# EAGLE board FLYTE_3.0 (EAGLE 9.6.2), part 1 of 2
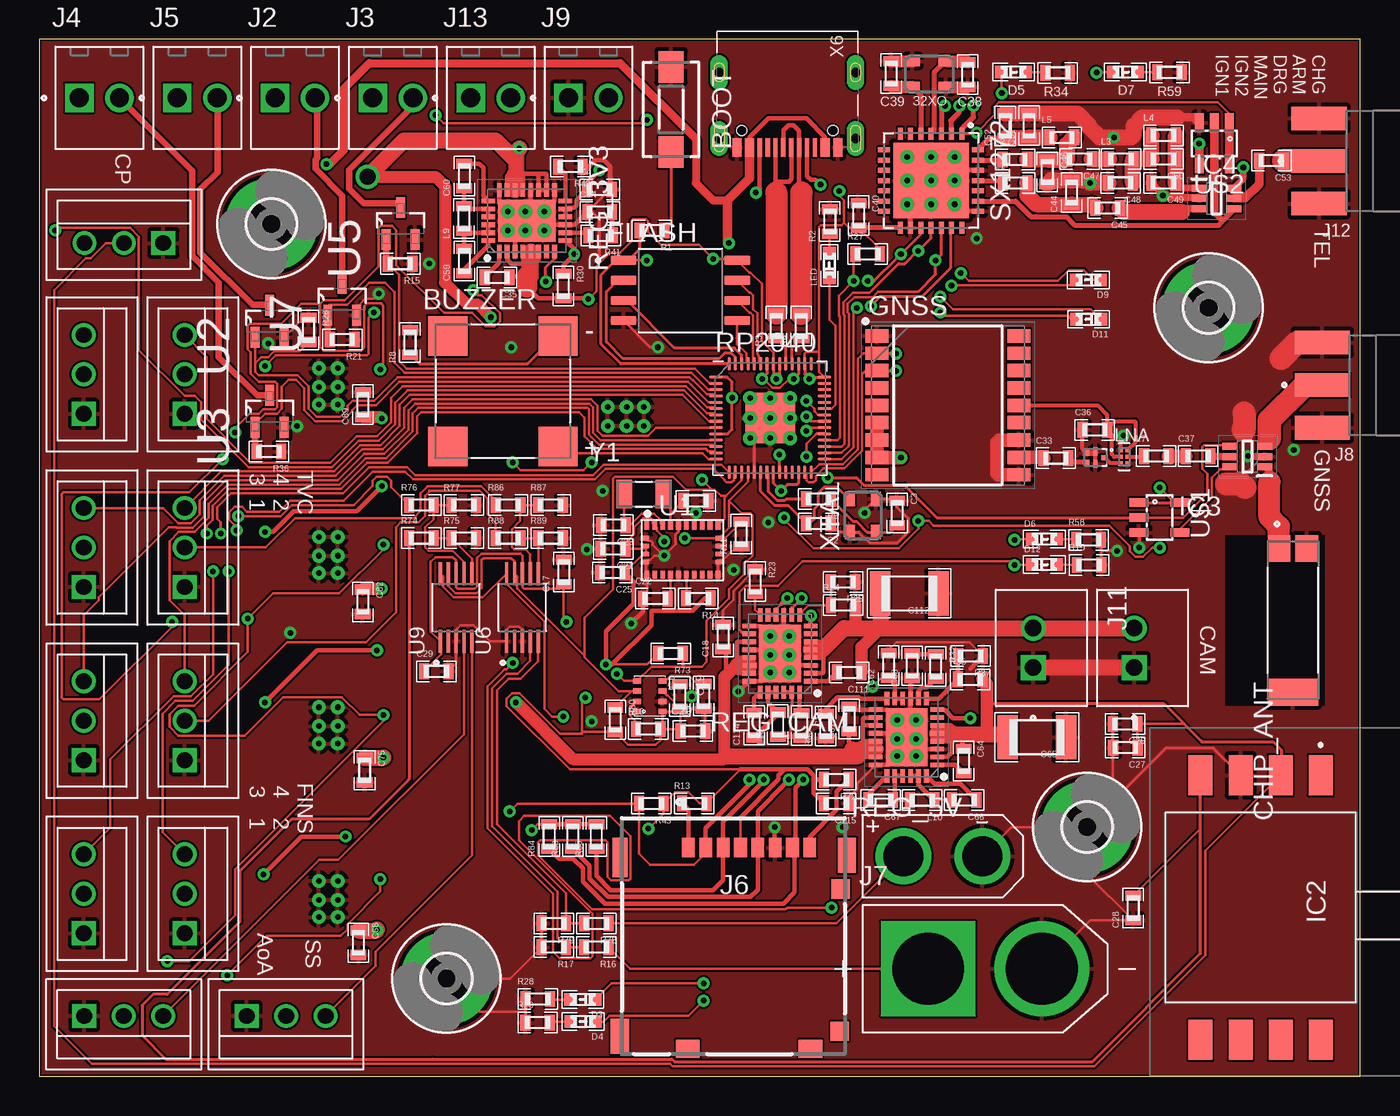
[diagram p0: board, top side]
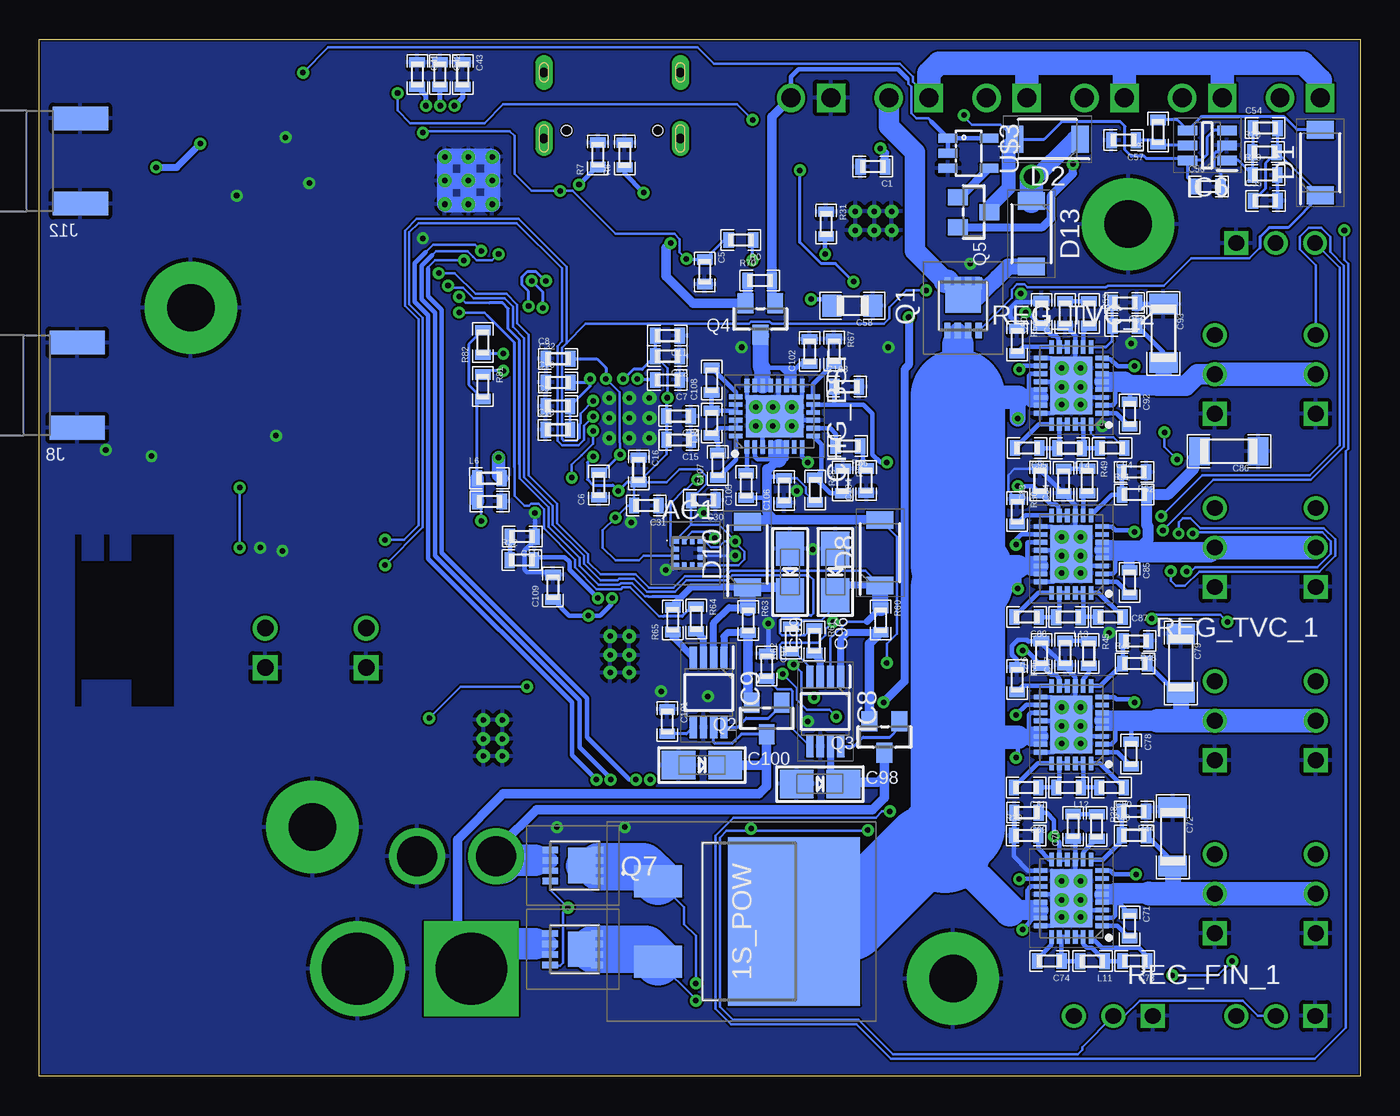
[diagram p1: board, bottom side, seen from below]

Size 83.7 x 65.7 mm. Coordinates in mm from the lower left corner, seen from the top.
Outline: 0,0 83.7,0 83.7,65.7 0,65.7 0,0
Copper layers (1*16): Top 0.075mm / dielectric 1.6mm / Bottom 0.075mm
Design rules "default *": minimum track width 5mil, minimum drill 0.1mm, track to track 5mil, track to pad 5mil, pad to pad 5mil, via to via 5mil, smd to smd 5mil, copper to edge 5mil, drill to drill 6mil, minimum pad ring 10mil, minimum via ring 8mil, stop-mask expansion 4mil, vias tented up to drill 0mil, thermal gap 10mil
Net classes: 1 power: width 0.305 mm

## Footprints (pad centres in the part's own frame; a part is rotated, then mirrored left to right if it is on the bottom)
V60D60CM3I = smd 2.03 x 3.05: 1 -2.54,-12.806; 2 2.54,-12.806 | smd 10.66 x 8.38: 3 0,-4.19
ASE = smd 0.9 x 0.65: 1 -1.05,-0.825; 2 1.05,-0.825; 3 1.05,0.825; 4 -1.05,0.825
KX1341211 = smd 0.35 x 0.3: 1 -0.762,0.75; 2 -0.762,0.25; 3 -0.762,-0.25; 4 -0.762,-0.75; 7 0.762,-0.75; 8 0.762,-0.25; 9 0.762,0.25; 10 0.762,0.75 | smd 0.3 x 0.35: 5 -0.25,-0.75; 6 0.25,-0.75; 11 0.25,0.75; 12 -0.25,0.75
B3B-XH = drill 1 square: P$1 2.5,0 | drill 1: P$2 0,0; P$3 -2.5,0
DTSM-3 = smd 2 x 1.6: 1 -2.7,0; 2 2.7,0
CUI_CMT-8530S-SMT = smd 2.5 x 2.5: 1 -3.5,3.5; 2 -3.5,-3.5; N 3.5,3.5; P 3.5,-3.5
0603 = smd 0.65 x 1: 1 -0.775,0; 2 0.775,0
0805 = smd 1.2 x 1.4: 1 -1.3,0; 2 1.3,0
1210 = smd 1.3 x 2.8: 1 -1.85,0; 2 1.85,0
1206 = smd 1.3 x 1.8: 1 -1.85,0; 2 1.85,0
EIA3216-18/A-W = smd 2.15 x 1.8: + 1.475,0; - -1.475,0
QFN50P400X500X83-29N = smd 0.85 x 0.3: 1 -1.95,1.75; 2 -1.95,1.25; 3 -1.95,0.75; 4 -1.95,0.25; 5 -1.95,-0.25; 6 -1.95,-0.75; 7 -1.95,-1.25; 8 -1.95,-1.75; 15 1.95,-1.75; 16 1.95,-1.25; 17 1.95,-0.75; 18 1.95,-0.25; 19 1.95,0.25; 20 1.95,0.75; 21 1.95,1.25; 22 1.95,1.75 | smd 0.3 x 0.85: 9 -1.25,-2.45; 10 -0.75,-2.45; 11 -0.25,-2.45; 12 0.25,-2.45; 13 0.75,-2.45; 14 1.25,-2.45; 23 1.25,2.45; 24 0.75,2.45; 25 0.25,2.45; 26 -0.25,2.45; 27 -0.75,2.45; 28 -1.25,2.45 | smd 2.65 x 3.65: 29 0,0 | drill 0.35: P$1 -0.6,1.2; P$2 0.6,1.2; P$3 -0.6,0.1; P$4 0.6,0.1; P$5 -0.6,-1.1; P$6 0.6,-1.1
XCVR_W3010 = smd 1.7 x 1.45: 1 4.55,0.875; 2 4.55,-0.875 | smd 1.7 x 3.2: 3 -4.55,0
SODFL4725X105N = smd 1.12 x 1.72: 1 -2.075,0; 2 2.075,0
0603.LED = smd 0.8 x 0.8: P$1 -0.775,0; P$2 0.775,0
SOIC127P790X216-8N = smd 1.61 x 0.58: 1 -3.605,1.905; 2 -3.605,0.635; 3 -3.605,-0.635; 4 -3.605,-1.905; 5 3.605,-1.905; 6 3.605,-0.635; 7 3.605,0.635; 8 3.605,1.905
SON110P970X1010X230-18N = smd 1.45 x 0.85: 1 -4.5,4.4; 2 -4.5,3.3; 3 -4.5,2.2; 4 -4.5,1.1; 5 -4.5,0; 6 -4.5,-1.1; 7 -4.5,-2.2; 8 -4.5,-3.3; 9 -4.5,-4.4; 10 4.5,-4.4; 11 4.5,-3.3; 12 4.5,-2.2; 13 4.5,-1.1; 14 4.5,0; 15 4.5,1.1; 16 4.5,2.2; 17 4.5,3.3; 18 4.5,4.4
3,0-PAD = drill 3 pad 5.842: B3,0 0,0
BMP280 = smd 0.35 x 0.5: 1 0.975,-0.8; 2 0.325,-0.8; 3 -0.325,-0.8; 4 -0.975,-0.8; 5 -0.975,0.8; 6 -0.325,0.8; 7 0.325,0.8; 8 0.975,0.8
MPXV5100DP = smd 2.54 x 1.52: 1 8.38,-3.81; 2 8.38,-1.27; 3 8.38,1.27; 4 8.38,3.81; 5 -8.38,3.81; 6 -8.38,1.27; 7 -8.38,-1.27; 8 -8.38,-3.81
SOT65P220X100-6N = smd 0.95 x 0.45: 1 -1.1,0.65; 2 -1.1,0; 3 -1.1,-0.65; 4 1.1,-0.65; 5 1.1,0; 6 1.1,0.65
SOT95P280X145-6N = smd 1.25 x 0.6: 1 -1.25,0.95; 2 -1.25,0; 3 -1.25,-0.95; 4 1.25,-0.95; 5 1.25,0; 6 1.25,0.95
SOP65P490X110-8N = smd 1.4 x 0.45: 1 -2.2,0.975; 2 -2.2,0.325; 3 -2.2,-0.325; 4 -2.2,-0.975; 5 2.2,-0.975; 6 2.2,-0.325; 7 2.2,0.325; 8 2.2,0.975
TE_282834-2 = drill 1.2 square: 1 -1.27,0 | drill 1.2: 2 1.27,0
5031821852 = smd 0.8 x 1.24: 1 -2.85,0.63; 2 -1.75,0.63; 3 -0.65,0.63; 4 0.45,0.63; 5 1.55,0.63; 6 2.65,0.63; 7 3.75,0.63; 8 4.85,0.63 | smd 0.95 x 2.5: 9 -7.195,0 | smd 1.15 x 2.2: 10 7.195,0.15; 15 -7.195,-11.33 | smd 1.16 x 1.25: 11 6.795,-2 | smd 1.16 x 1.2: 12 6.74,-11 | smd 1.5 x 1.15: 13 4.89,-12.125; 14 -2.89,-12.125
AMASS_XT60-M = drill 4.55 pad 6: N 3.6,0 | drill 4.55 pad 6 square: P -3.6,0
RFSOLUTIONS_CON-SMA-EDGE-S = smd 3.5 x 1.5: 1 0,0; G1 0,2.7; G2 0,-2.7 | smd 3.5 x 1.5 bottom: G3 0,2.7; G4 0,-2.7
JST_B2B-XH-A(LF)(SN) = drill 1.05 square: 1 1.25,-0.525 | drill 1.05: 2 -1.25,-0.525
AMP_BGA725L6E6327FTSA1 = smd 0.25 x 0.25: 1 -0.2,0.4; 2 -0.2,0; 3 -0.2,-0.4; 4 0.2,-0.4; 5 0.2,0; 6 0.2,0.4
SIS862DNT1GE3 = smd 0.99 x 0.405: 1 -1.555,0.992; 2 -1.555,0.332; 3 -1.555,-0.328; 4 -1.555,-0.988 | smd 0.51 x 0.405: 5 1.555,-0.988; 6 1.555,-0.328; 7 1.555,0.332; 8 1.555,0.992 | smd 1.725 x 2.235: 9 0.438,0.002 | smd 0.25 x 0.2: 10 1.175,-1.096; 11 1.175,1.096
SOT23-WIDE = smd 1 x 1.27: 1 -0.95,-1; 2 0.95,-1; 3 0,1
RP2040-QFN-56 = smd 0.875 x 0.2: 1 -3.438,2.6; 2 -3.438,2.2; 3 -3.438,1.8; 4 -3.438,1.4; 5 -3.438,1; 6 -3.438,0.6; 7 -3.438,0.2; 8 -3.438,-0.2; 9 -3.438,-0.6; 10 -3.438,-1; 11 -3.438,-1.4; 12 -3.438,-1.8; 13 -3.438,-2.2; 14 -3.438,-2.6; 29 3.438,-2.6; 30 3.438,-2.2; 31 3.438,-1.8; 32 3.438,-1.4; 33 3.438,-1; 34 3.438,-0.6; 35 3.438,-0.2; 36 3.438,0.2; 37 3.438,0.6; 38 3.438,1; 39 3.438,1.4; 40 3.438,1.8; 41 3.438,2.2; 42 3.438,2.6 | smd 0.2 x 0.875: 15 -2.6,-3.438; 16 -2.2,-3.438; 17 -1.8,-3.438; 18 -1.4,-3.438; 19 -1,-3.438; 20 -0.6,-3.438; 21 -0.2,-3.438; 22 0.2,-3.438; 23 0.6,-3.438; 24 1,-3.438; 25 1.4,-3.438; 26 1.8,-3.438; 27 2.2,-3.438; 28 2.6,-3.438; 43 2.6,3.438; 44 2.2,3.438; 45 1.8,3.438; 46 1.4,3.438; 47 1,3.438; 48 0.6,3.438; 49 0.2,3.438; 50 -0.2,3.438; 51 -0.6,3.438; 52 -1,3.438; 53 -1.4,3.438; 54 -1.8,3.438; 55 -2.2,3.438; 56 -2.6,3.438 | smd 3.2 x 3.2: 57 0,0 | drill 0.35 pad 0.6: 58 -1.275,1.275; 59 0,1.275; 60 1.275,1.275; 61 -1.275,0; 62 0,0; 63 1.275,0; 64 -1.275,-1.275; 65 0,-1.275; 66 1.275,-1.275
FIL_AFS14A04-1575.42-T3 = smd 0.425 x 0.325: A 0.588,0.287; C -0.588,0; E 0.588,-0.287 | smd 0.25 x 0.525: B 0,0.388; D 0,-0.388
QFN65P600X600X100-29N = smd 0.76 x 0.32: 1 -2.98,1.95; 2 -2.98,1.3; 3 -2.98,0.65; 4 -2.98,0; 5 -2.98,-0.65; 6 -2.98,-1.3; 7 -2.98,-1.95; 15 2.98,-1.95; 16 2.98,-1.3; 17 2.98,-0.65; 18 2.98,0; 19 2.98,0.65; 20 2.98,1.3; 21 2.98,1.95 | smd 0.32 x 0.76: 8 -1.95,-2.98; 9 -1.3,-2.98; 10 -0.65,-2.98; 11 0,-2.98; 12 0.65,-2.98; 13 1.3,-2.98; 14 1.95,-2.98; 22 1.95,2.98; 23 1.3,2.98; 24 0.65,2.98; 25 0,2.98; 26 -0.65,2.98; 27 -1.3,2.98; 28 -1.95,2.98 | smd 4.8 x 4.8: 29 0,0 | drill 0.35: P$1 -1.5,1.5; P$2 0,1.5; P$3 1.5,1.5; P$4 1.5,0; P$5 0,0; P$6 -1.5,0; P$7 -1.5,-1.5; P$8 0,-1.5; P$9 1.5,-1.5
LGA28R50P4X10_380X520X100 = smd 0.3 x 0.525: 1 -2.25,1.562; 6 -2.25,-1.562; 7 -1.75,-1.562; 8 -1.25,-1.562; 9 -0.75,-1.562; 10 -0.25,-1.562; 11 0.25,-1.562; 12 0.75,-1.562; 13 1.25,-1.562; 14 1.75,-1.562; 15 2.25,-1.562; 20 2.25,1.562; 21 1.75,1.562; 22 1.25,1.562; 23 0.75,1.562; 24 0.25,1.562; 25 -0.25,1.562; 26 -0.75,1.562; 27 -1.25,1.562; 28 -1.75,1.562 | smd 0.425 x 0.3: 2 -2.312,0.75; 3 -2.312,0.25; 4 -2.312,-0.25; 5 -2.312,-0.75; 16 2.312,-0.75; 17 2.312,-0.25; 18 2.312,0.25; 19 2.312,0.75
SOT91P240X120-3N = smd 1.321 x 0.559: 1 -1.016,0.914; 2 -1.016,-0.914; 3 1.016,0
SOP50P490X110-10N = smd 1.47 x 0.28: 1 -2.15,1; 2 -2.15,0.5; 3 -2.15,0; 4 -2.15,-0.5; 5 -2.15,-1; 6 2.15,-1; 7 2.15,-0.5; 8 2.15,0; 9 2.15,0.5; 10 2.15,1
SOT23-5 = smd 0.55 x 1.2: 1 -0.95,-1.3; 2 0,-1.3; 3 0.95,-1.3; 4 0.95,1.3; 5 -0.95,1.3
XT30UPB-M = drill 2.54: P$1 -2.5,0; P$2 2.5,0
USB_C_CUSB31-CFM2AX-01-X = smd 0.575 x 1.15: A1B12 -3.2,3.545; A4B9 -2.4,3.545; B1A12 3.2,3.545; B4A9 2.4,3.545 | smd 0.275 x 1.15: A5 -1.25,3.545; A6 -0.25,3.545; A7 0.25,3.545; A8 1.25,3.545; B5 1.75,3.545; B6 0.75,3.545; B7 -0.75,3.545; B8 -1.75,3.545 | drill 0.6 pad 1 long: M1 -4.32,2.97; M2 4.32,2.97; M3 -4.32,-1.21; M4 4.32,-1.21 | hole 0.65: 2.89,2.47; -2.89,2.47
XTAL_FC-135_32.7680KA-A0 = smd 1 x 1.8: 1 -1.25,0; 2 1.25,0

## Placement (x,y rotation side)
1S_POW  V60D60C-M3_I  [V60D60CM3I]  31.69,9.82 270 bottom
32XO  ASE  [ASE]  56.39,63.51 0 top
AC1  KX134-1211  [KX1341211]  42.58,33.15 0 bottom
AOA  03-JST-B3B-XH-A  [B3B-XH]  5.34,3.83 180 top
BOOT  DTSM-3  [DTSM-3]  40.03,61.26 270 top
BUZZER  BUZZER  [CUI_CMT-8530S-SMT]  29.37,43.42 0 top
C1  10 uF  [0603]  30.88,57.64 180 bottom
C2  24 pF  [0603]  49.37,35.04 180 top
C3  24 pF  [0603]  54.36,35.7 270 top
C4  4.7 uF  [0603]  35.5,56.2 0 top
C5  100 nF  [0603]  41.54,50.98 270 bottom
C6  100 nF  [0603]  48.24,37.47 90 bottom
C7  100 nF  [0603]  43.9,44.13 180 bottom
C8  1 uF  [0603]  50.83,45.47 0 bottom
C9  100 nF  [0603]  50.84,42.47 0 bottom
C10  1 uF  [0603]  50.83,43.97 0 bottom
C11  100 nF  [0603]  43.9,46.93 180 bottom
C12  100 nF  [0603]  43.9,45.63 180 bottom
C13  100 nF  [0603]  50.84,40.97 0 bottom
C14  100 nF  [0603]  43.19,41.83 180 bottom
C15  100 nF  [0603]  43.18,40.33 180 bottom
C16  100 nF  [0603]  45.73,38.43 270 bottom
C17  0.1 uF  [0603]  33.23,31.96 90 top
C18  10 uF  [0603]  43.33,27.85 90 top
C19  100 nF  [0603]  40.58,24.07 270 top
C20  100 nF  [0603]  41.42,21.88 0 top
C21  100 nF  [0603]  36.36,33.43 180 top
C22  100 nF  [0603]  39.03,30.27 0 top
C23  25 pF  [0603]  36.38,34.93 180 top
C24  25 pF  [0603]  41.61,36.47 0 top
C25  100 nF  [0603]  36.3,31.93 180 top
C26  1 uF  [0603]  68.81,22.33 180 top
C27  10 nF  [0603]  68.82,20.83 180 top
C28  470 pF  [0603]  69.33,10.67 90 top
C29  0.1 uF  [0603]  25.16,25.67 0 top
C30  0.1 uF  [0603]  41.62,36.51 180 bottom
C31  0.1 uF  [0603]  45.24,36.17 180 bottom
C32  10 nF  [0603]  55.17,36.43 180 bottom
C33  120 pF  [0603]  64.42,39.17 0 top
C34  3.3 nF  [0603]  35.51,54.77 0 top
C35  22 nF  [0603]  29,50.63 180 top
C36  1 nF  [0603]  66.89,40.97 0 top
C37  120 pF  [0603]  73.44,39.3 0 top
C38  24 pF  [0603]  58.83,63.47 90 top
C39  24 pF  [0603]  53.98,63.54 270 top
C40  100 nF  [0603]  51.92,54.55 270 top
C41  100 nF  [0603]  59.76,63.48 270 bottom
C42  100 nF  [0603]  58.32,63.48 270 bottom
C43  100 nF  [0603]  56.88,63.48 270 bottom
C44  3.3 pF  [0603]  65.42,56.01 90 top
C45  47 pF  [0603]  67.7,55.02 180 top
C46  8.2 pF  [0603]  63.88,57.31 270 top
C47  22 pF  [0603]  65.92,58.12 180 top
C48  8.2 pF  [0603]  68.53,56.62 180 top
C49  3.3 pF  [0603]  71.24,56.62 180 top
C50  1.5 pF  [0603]  71.25,58.12 180 top
C51  10 nF  [0603]  62.72,60.24 90 top
C52  47 pF  [0603]  61.22,60.23 90 top
C53  47 pF  [0603]  78.08,58.02 180 top
C54  10 pF  [0603]  6.01,60.08 0 bottom
C55  1 uF  [0603]  6,55.48 0 bottom
C56  1 uF  [0603]  9.61,56.38 0 bottom
C57  4.7 uF  [0603]  14.98,59.32 180 bottom
C58  100 uF  [0805]  32.17,48.83 180 bottom
C59  0.22 uF  [0603]  26.92,51.66 90 top
C60  0.22 uF  [0603]  26.92,57.05 90 top
C61  10 uF  [0603]  51.32,22.64 90 top
C62  4.7 uF  [0603]  53.82,26.03 90 top
C63  1.8 nF  [0603]  55.32,26.02 90 top
C64  22 nF  [0603]  58.58,19.99 270 top
C65  220 uF  [1210]  63.22,21.49 180 top
C66  0.22 uF  [0603]  58.61,17.52 180 top
C67  0.22 uF  [0603]  53.32,17.52 180 top
C68  10 uF  [0603]  20.22,8.47 270 top
C69  4.7 uF  [0603]  21.14,16.71 180 bottom
C70  1.8 nF  [0603]  18.19,15.85 90 bottom
C71  22 nF  [0603]  14.61,9.54 270 bottom
C72  100 uF  [1206]  11.87,15.19 270 bottom
C73  0.22 uF  [0603]  14.28,7.31 180 bottom
C74  0.22 uF  [0603]  19.69,7.31 180 bottom
C75  10 uF  [0603]  20.61,19.4 270 top
C76  4.7 uF  [0603]  20.19,26.81 90 bottom
C77  1.8 nF  [0603]  18.69,26.82 90 bottom
C78  22 nF  [0603]  14.51,20.43 270 bottom
C79  100 uF  [1206]  11.36,26.19 270 bottom
C80  0.22 uF  [0603]  15.75,18.31 180 bottom
C81  0.22 uF  [0603]  21.16,18.31 180 bottom
C82  10 uF  [0603]  20.49,30.07 270 top
C83  4.7 uF  [0603]  20.29,37.72 90 bottom
C84  1.8 nF  [0603]  18.79,37.71 90 bottom
C85  22 nF  [0603]  14.61,31.3 270 bottom
C86  100 uF  [1206]  8.31,39.61 180 bottom
C87  0.22 uF  [0603]  15.82,29.11 180 bottom
C88  0.22 uF  [0603]  21.13,29.11 180 bottom
C89  10 uF  [0603]  20.51,42.56 90 top
C90  4.7 uF  [0603]  20.19,48.35 90 bottom
C91  1.8 nF  [0603]  18.69,48.34 90 bottom
C92  22 nF  [0603]  14.61,41.97 270 bottom
C93  100 uF  [1206]  12.46,47.08 270 bottom
C94  0.22 uF  [0603]  15.71,39.81 180 bottom
C95  0.22 uF  [0603]  21.1,39.81 180 bottom
C96  10uF  [EIA3216-18/A-W]  33.26,31.96 270 bottom
C97  0.1 uF  [0603]  37.61,25.99 270 bottom
C98  10uF  [EIA3216-18/A-W]  34.23,18.53 0 bottom
C99  10uF  [EIA3216-18/A-W]  36.13,31.96 270 bottom
C100  10uF  [EIA3216-18/A-W]  41.71,19.73 0 bottom
C101  0.1 uF  [0603]  43.91,22.48 270 bottom
C102  10 uF  [0603]  34.89,45.93 90 bottom
C103  4.7 uF  [0603]  32.54,43.7 0 bottom
C104  1.2 nF  [0603]  31.3,37.75 90 bottom
C105  22 nF  [0603]  38.9,37.44 90 bottom
C106  10 uF  [0603]  36.5,37.13 90 bottom
C107  0.22 uF  [0603]  40.7,38.72 90 bottom
C108  0.22 uF  [0603]  41.1,44.11 90 bottom
C109  4.7 uF  [0603]  51.15,31 90 bottom
C110  1.8 nF  [0603]  53.11,34.2 180 bottom
C111  22 nF  [0603]  51.32,25.6 180 top
C112  100 uF  [1210]  55.13,30.6 180 top
C113  0.22 uF  [0603]  48.3,22.24 270 top
C114  0.22 uF  [0603]  45.3,22.25 90 top
C115  1 uF  [0603]  50.5,17.3 180 top
CHG_BST  LT3120JV#PBF  [QFN50P400X500X83-29N]  37.11,41.82 90 bottom
CHIP_ANT  W3010  [XCVR_W3010]  79.44,28.9 90 top
D1  RSX501LAM20TR  [SODFL4725X105N]  2.52,57.9 90 bottom
D2  RSX501LAM20TR  [SODFL4725X105N]  19.81,59.38 180 bottom
D3  [0603.LED]  34.44,4.87 180 top
D4  [0603.LED]  34.45,3.47 180 top
D5  [0603.LED]  61.74,63.63 0 top
D6  [0603.LED]  63.69,34.04 0 top
D7  [0603.LED]  68.82,63.63 0 top
D8  RSX501LAM20TR  [SODFL4725X105N]  30.42,33.18 90 bottom
D9  [0603.LED]  66.49,50.47 180 top
D10  RSX501LAM20TR  [SODFL4725X105N]  38.82,33.07 90 bottom
D11  [0603.LED]  66.5,47.97 180 top
D12  [0603.LED]  63.69,32.43 0 top
D13  RSX501LAM20TR  [SODFL4725X105N]  20.83,53.39 270 bottom
FIN_1  03-JST-B3B-XH-A  [B3B-XH]  2.8,11.57 270 top
FIN_2  03-JST-B3B-XH-A  [B3B-XH]  9.2,11.57 270 top
FIN_3  03-JST-B3B-XH-A  [B3B-XH]  2.8,22.54 270 top
FIN_4  03-JST-B3B-XH-A  [B3B-XH]  9.2,22.54 270 top
FLASH  W25Q128JVSIQ  [SOIC127P790X216-8N]  40.62,49.8 0 top
GNSS  TESEO-LIV3F  [SON110P970X1010X230-18N]  57.57,42.52 0 top
H1  MOUNT-PAD-ROUND3.0  [3,0-PAD]  66.4,15.8 0 top
H2  MOUNT-PAD-ROUND3.0  [3,0-PAD]  74.1,48.7 0 top
H3  MOUNT-PAD-ROUND3.0  [3,0-PAD]  25.8,6.2 0 top
H4  MOUNT-PAD-ROUND3.0  [3,0-PAD]  14.7,54 0 top
IC1  BMP280  [BMP280]  38.68,24.09 270 top
IC2  MPXV5100DP  [MPXV5100DP]  77.4,10.7 90 top
IC3  AS179-92LF  [SOT65P220X100-6N]  76.56,39.27 180 top
IC4  AS179-92LF  [SOT65P220X100-6N]  74.61,55.63 0 top
IC6  MAX8574EUT+T  [SOT95P280X145-6N]  9.68,58.99 180 bottom
IC8  MCP73843-420I_MS  [SOP65P490X110-8N]  33.89,23.13 270 bottom
IC9  MCP73844-840I_MS  [SOP65P490X110-8N]  41.29,24.33 270 bottom
J2  282834-2  [TE_282834-2]  16.2,62 0 top
J3  282834-2  [TE_282834-2]  22.4,62 0 top
J4  282834-2  [TE_282834-2]  3.8,62 0 top
J5  282834-2  [TE_282834-2]  10,62 0 top
J6  503182-1852  [5031821852]  43.98,13.87 0 top
J7  XT60-M  [AMASS_XT60-M]  59.93,6.82 0 top
J8  CON-SMA-EDGE-S  [RFSOLUTIONS_CON-SMA-EDGE-S]  81.3,43.8 180 top
J9  282834-2  [TE_282834-2]  34.8,62 0 top
J10  B2B-XH-A(LF)(SN)  [JST_B2B-XH-A(LF)(SN)]  69.91,27.15 270 top
J11  B2B-XH-A(LF)(SN)  [JST_B2B-XH-A(LF)(SN)]  63.51,27.15 270 top
J12  CON-SMA-EDGE-S  [RFSOLUTIONS_CON-SMA-EDGE-S]  81.1,58 180 top
J13  282834-2  [TE_282834-2]  28.6,62 0 top
L1  10 nH  [0603]  61.84,56.6 0 top
L2  2.7 nH  [0603]  61.83,58.1 0 top
L3  5.6 nH  [0603]  68.56,58.12 0 top
L4  5.6 nH  [0603]  71.25,59.63 0 top
L5  33 nH  [0603]  64.8,59.5 0 top
L6  27 nH  [0603]  55.19,37.9 0 bottom
L7  5.6 nH  [0603]  70.78,39.3 0 top
L8  22 uH  [0603]  12.8,59.83 90 bottom
L9  4.7 uH  [0603]  26.9,54.36 90 top
L10  4.7 uH  [0603]  55.95,17.5 180 top
L11  4.7 uH  [0603]  16.96,7.3 180 bottom
L12  4.7 uH  [0603]  18.47,18.3 180 bottom
L13  4.7 uH  [0603]  18.48,29.1 180 bottom
L14  4.7 uH  [0603]  18.41,39.8 180 bottom
L15  4.7 uH  [0603]  41.1,41.4 90 bottom
L16  4.7 uH  [0603]  46.8,22.29 90 top
LED  [0603.LED]  50.07,51.38 90 top
LNA  BGA725L6  [AMP_BGA725L6E6327FTSA1]  68.75,39.26 0 top
MOTOR  03-JST-B3B-XH-A  [B3B-XH]  5.35,52.8 0 top
Q1  SI7625DN-T1-GE3  [SIS862DNT1GE3]  25.16,48.81 90 bottom
Q2  [SOT23-WIDE]  37.61,22.69 180 bottom
Q3  [SOT23-WIDE]  30.14,21.51 180 bottom
Q4  [SOT23-WIDE]  38.01,47.99 180 bottom
Q5  [SOT23-WIDE]  24.49,54.76 270 bottom
Q6  SI7625DN-T1-GE3  [SIS862DNT1GE3]  49.78,8.06 0 bottom
Q7  SI7625DN-T1-GE3  [SIS862DNT1GE3]  49.77,13.36 0 bottom
R0  10k ohm  [0603]  39.24,52.99 180 bottom
R1  1k ohm  [0603]  38.82,53.6 180 top
R2  60 ohm  [0603]  50.1,54.17 90 top
R3  27.4 ohm  [0603]  46.69,47.55 90 top
R4  27.4 ohm  [0603]  48.29,47.54 90 top
R5  1k ohm  [0603]  49.37,36.59 180 top
R6  5.1k ohm  [0603]  46.61,58.38 90 bottom
R7  5.1k ohm  [0603]  48.31,58.39 90 bottom
R8  100 ohm  [0603]  23.49,46.5 90 top
R9  10k ohm  [0603]  42.09,24.09 90 top
R10  10k ohm  [0603]  38.58,22.01 0 top
R11  10 kohm  [0603]  44.49,34.37 90 top
R13  10k ohm  [0603]  41.5,17.3 0 top
R14  10 kohm  [0603]  41.75,30.29 180 top
R15  10k ohm  [0603]  22.86,51.49 180 top
R16  412k ohm  [0603]  35.29,8.19 180 top
R17  100k ohm  [0603]  32.6,8.19 180 top
R18  137k ohm  [0603]  6.06,58.56 0 bottom
R19  60 ohm  [0603]  66.53,32.41 0 top
R20  10k ohm  [0603]  6.02,57.11 0 bottom
R21  10k ohm  [0603]  19.19,46.69 180 top
R22  46.4k ohm  [0603]  53.13,32.71 0 bottom
R23  158k ohm  [0603]  45.36,31.35 270 top
R24  523k ohm  [0603]  50.94,29.86 0 top
R25  100k ohm  [0603]  50.93,31.33 180 top
R26  10k ohm  [0603]  17.06,47.3 270 top
R27  10k ohm  [0603]  52.49,52.11 0 top
R28  105 ohm  [0603]  31.58,4.91 0 top
R29  315 ohm  [0603]  31.57,3.41 0 top
R30  316k ohm  [0603]  33.21,50.08 270 top
R31  100k ohm  [0603]  33.84,54.01 270 bottom
R32  46.4k ohm  [0603]  56.81,25.98 270 top
R33  158k ohm  [0603]  49.84,22.2 90 top
R34  158 ohm  [0603]  64.54,63.59 180 top
R35  523k ohm  [0603]  58.99,25.16 0 top
R36  10k ohm  [0603]  14.55,39.59 180 top
R37  100k ohm  [0603]  59.02,26.64 180 top
R38  46.4k ohm  [0603]  16.69,15.84 270 bottom
R39  158k ohm  [0603]  21.17,15.26 0 bottom
R40  402k ohm  [0603]  14.33,15.28 0 bottom
R41  21k ohm  [0603]  35.57,53.29 180 top
R42  158k ohm  [0603]  33.65,57.64 180 top
R43  10k ohm  [0603]  38.78,17.29 180 top
R44  50k ohm  [0603]  14.33,16.78 180 bottom
R45  46.4k ohm  [0603]  17.19,26.8 270 bottom
R46  158k ohm  [0603]  21.74,25.14 270 bottom
R47  402k ohm  [0603]  14.27,26.16 0 bottom
R48  50k ohm  [0603]  14.19,27.59 180 bottom
R49  46.4k ohm  [0603]  17.29,37.72 270 bottom
R50  158k ohm  [0603]  21.74,35.78 270 bottom
R51  402k ohm  [0603]  14.31,36.86 0 bottom
R52  50k ohm  [0603]  14.33,38.29 180 bottom
R53  46.4k ohm  [0603]  17.18,48.34 270 bottom
R54  158k ohm  [0603]  21.74,46.6 270 bottom
R55  402k ohm  [0603]  14.91,47.56 0 bottom
R56  50k ohm  [0603]  14.91,49.01 180 bottom
R58  60 ohm  [0603]  66.5,34 0 top
R59  315 ohm  [0603]  71.62,63.62 0 top
R60  0.1 ohm  [0603]  30.38,28.91 270 bottom
R61  158 ohm  [0603]  34.58,27.6 270 bottom
R62  100k ohm  [0603]  36.06,27.72 90 bottom
R63  0.1 ohm  [0603]  38.78,28.89 270 bottom
R64  158 ohm  [0603]  42.08,28.98 270 bottom
R65  100k ohm  [0603]  43.56,28.93 90 bottom
R66  100k ohm  [0603]  32.46,39.94 180 bottom
R67  158k ohm  [0603]  33.34,45.95 270 bottom
R68  1.3M ohm  [0603]  34.54,37.16 270 bottom
R69  100k ohm  [0603]  32.78,37.73 270 bottom
R70  10k ohm  [0603]  38.04,50.42 0 bottom
R72  10k ohm  [0603]  50.5,18.8 180 top
R73  10k ohm  [0603]  40,26.8 180 top
R74  36.5k ohm  [0603]  24.2,34.1 0 top
R75  100k ohm  [0603]  26.9,34.1 0 top
R76  43k ohm  [0603]  24.2,36.2 0 top
R77  100k ohm  [0603]  26.9,36.2 0 top
R78  28k ohm  [0603]  35.3,9.7 180 top
R79  100k ohm  [0603]  32.6,9.7 180 top
R80  10k ohm  [0603]  36.5,22.6 270 top
R81  10k ohm  [0603]  55.6,43.7 270 bottom
R82  10k ohm  [0603]  55.6,46.5 90 bottom
R83  10k ohm  [0603]  33.8,15.2 90 top
R84  10k ohm  [0603]  32.3,15.2 90 top
R85  10k ohm  [0603]  35.3,15.2 90 top
R86  158k ohm  [0603]  29.7,36.2 0 top
R87  100k ohm  [0603]  32.4,36.2 0 top
R88  158k ohm  [0603]  29.7,34.1 0 top
R89  100k ohm  [0603]  32.4,34.1 0 top
REG_3V3  LT3120JV#PBF  [QFN50P400X500X83-29N]  30.89,54.21 90 top
REG_5V  LT3120JV#PBF  [QFN50P400X500X83-29N]  54.96,21.49 180 top
REG_CAM  LT3120JV#PBF  [QFN50P400X500X83-29N]  46.93,26.79 180 top
REG_FIN_1  LT3120JV#PBF  [QFN50P400X500X83-29N]  18.3,11.29 180 bottom
REG_FIN_2  LT3120JV#PBF  [QFN50P400X500X83-29N]  18.3,22.29 180 bottom
REG_TVC_1  LT3120JV#PBF  [QFN50P400X500X83-29N]  18.3,33.09 180 bottom
REG_TVC_2  LT3120JV#PBF  [QFN50P400X500X83-29N]  18.3,43.77 180 bottom
RP2040  RP2040-QFN56  [RP2040-QFN-56]  46.31,41.71 0 top
SAW  SAW_FILTER  [FIL_AFS14A04-1575.42-T3]  66.93,39.21 180 top
SS  03-JST-B3B-XH-A  [B3B-XH]  15.63,3.83 180 top
SX1272  SX1272IMLTRT  [QFN65P600X600X100-29N]  56.51,56.76 270 top
TVC_1  03-JST-B3B-XH-A  [B3B-XH]  2.8,33.51 270 top
TVC_2  03-JST-B3B-XH-A  [B3B-XH]  9.2,33.51 270 top
TVC_3  03-JST-B3B-XH-A  [B3B-XH]  2.8,44.48 270 top
TVC_4  03-JST-B3B-XH-A  [B3B-XH]  9.2,44.48 270 top
U1  BNO055  [LGA28R50P4X10_380X520X100]  40.75,33.35 0 top
U2  CJ3400  [SOT91P240X120-3N]  14.59,47.84 90 top
U3  CJ3400  [SOT91P240X120-3N]  14.59,42.14 90 top
U5  CJ3400  [SOT91P240X120-3N]  22.89,54.04 90 top
U6  ADS1115IDGSR  [SOP50P490X110-10N]  30.61,29.71 90 top
U7  CJ3400  [SOT91P240X120-3N]  19.19,49.24 90 top
U9  ADS1115IDGSR  [SOP50P490X110-10N]  26.41,29.71 90 top
U$1  SN74LVC1G04DBVR  [SOT23-5]  70.99,35.41 270 top
U$2  SN74LVC1G04DBVR  [SOT23-5]  74.46,59.11 180 top
U$3  SN74LVC1G04DBVR  [SOT23-5]  24.81,58.49 270 bottom
U$11  XT30UPB-M  [XT30UPB-M]  57.26,13.96 0 top
X6  USB Type C  [USB_C_CUSB31-CFM2AX-01-X]  47.4,62.4 180 top
XTAL  ASE  [ASE]  52.19,35.54 90 top
Y1  FC-135_32.7680KA-A0  [XTAL_FC-135_32.7680KA-A0]  38.31,36.89 0 top

## Library data of the parts
1S_POW = V60D60C-M3_I; DESCRIPTION: Schottky Diodes & Rectifiers 60V 60A SMPD(TO-263AC); HEIGHT: 1.8mm; MANUFACTURER_NAME: Vishay; MANUFACTURER_PART_NUMBER: V60D60C-M3/I
32XO XTAL = crystal; OC_FARNELL: unknown; OC_NEWARK: unknown
AC1 = KX134-1211; DESCRIPTION: Accelerometers Tri-Axis Acclrmtr 8g, 16g, 32g; HEIGHT: 1mm; MANUFACTURER_NAME: Kionix; MANUFACTURER_PART_NUMBER: KX134-1211
AOA FIN_1-FIN_4 MOTOR SS TVC_1-TVC_4 = bt_con-jst-xh (1)
BOOT = switch-tact
BUZZER = CMT-8530S-SMT; AVAILABILITY: In Stock; CHECK_PRICES: https://www.snapeda.com/parts/CMT-8530S-SMT-TR/CUI+Devices/view-part/?ref=eda; CUI_PURCHASE_URL: https://www.cuidevices.com/product/audio/buzzers/audio-transducers/cmt-8530s-smt-tr?utm_source=snapeda.com&utm_medium=referral&utm_campaign=snapedaBOM; DESCRIPTION: 8.5 mm, 3.6 Vo-p, 90 dB, Surface Mount (SMT), Magnetic Audio Transducer Buzzer; MF: CUI Devices; MP: CMT-8530S-SMT-TR; PACKAGE: None; PRICE: None; PURCHASE-URL: https://www.snapeda.com/api/url_track_click_mouser/?unipart_id=649163&manufacturer=CUI Devices&part_name=CMT-8530S-SMT-TR&search_term=None; SNAPEDA_LINK: https://www.snapeda.com/parts/CMT-8530S-SMT-TR/CUI+Devices/view-part/?ref=snap
C1-C95 C97 C101-C115 D3-D7 D9 D11 D12 L1-L16 LED R0 R1-R11 R13-R56 R58-R70 R72-R89 = standardparts
C96 C98-C100 Q2-Q5 X6 = microbuilder
CHG_BST REG_3V3 REG_5V REG_CAM REG_FIN_1 REG_FIN_2 REG_TVC_1 REG_TVC_2 = LT3120JV#PBF; DESCRIPTION: Switching Voltage Regulators 24V, 6.5A Sync Buck-Boost Converter; HEIGHT: 0.83mm; MANUFACTURER_NAME: Analog Devices; MANUFACTURER_PART_NUMBER: LT3120JV#PBF
CHIP_ANT = W3010; AVAILABILITY: Not in stock; CHECK_PRICES: https://www.snapeda.com/parts/W3010/PulseLarsen+Antennas/view-part/?ref=eda; DESCRIPTION: 1.575GHz GPS Chip RF Antenna - 2.8dBi Solder Surface Mount; MF: PulseLarsen Antennas; MP: W3010; PACKAGE: None; PRICE: None; PURCHASE-URL: https://www.snapeda.com/api/url_track_click_mouser/?unipart_id=242644&manufacturer=PulseLarsen Antennas&part_name=W3010&search_term=None; SNAPEDA_LINK: https://www.snapeda.com/parts/W3010/PulseLarsen+Antennas/view-part/?ref=snap
D1 D2 D8 D10 D13 = RSX501LAM20TR; DESCRIPTION: 20V, 5A, SOD-128, Schottky Barrier Diode; HEIGHT: 1.05mm; MANUFACTURER_NAME: ROHM Semiconductor; MANUFACTURER_PART_NUMBER: RSX501LAM20TR
FLASH = W25Q128JVSIQ; AVAILABILITY: In Stock; CHECK_PRICES: https://www.snapeda.com/parts/W25Q128JVSIQ/Winbond+Electronics/view-part/?ref=eda; DESCRIPTION: FLASH - NOR Memory IC 128Mb (16M x 8) SPI - Quad I/O, QPI, DTR 133 MHz 8-SOIC; MF: Winbond Electronics; MP: W25Q128JVSIQ; PACKAGE: SOIC-8 Winbond Electronics; PRICE: None; SNAPEDA_LINK: https://www.snapeda.com/parts/W25Q128JVSIQ/Winbond+Electronics/view-part/?ref=snap
GNSS = TESEO-LIV3F; AVAILABILITY: In Stock; CHECK_PRICES: https://www.snapeda.com/parts/TESEO-LIV3F/STMicroelectronics/view-part/?ref=eda; DESCRIPTION: - RF Receiver BeiDou, Galileo, GLONASS, GNSS, GPS 1.575GHz -163dBm Not Included 18-LCC (9.7x10.1); MF: STMicroelectronics; MP: TESEO-LIV3F; PACKAGE: SMD-18 STMicroelectronics; PRICE: None; PURCHASE-URL: https://www.snapeda.com/api/url_track_click_mouser/?unipart_id=1474256&manufacturer=STMicroelectronics&part_name=TESEO-LIV3F&search_term=None; SNAPEDA_LINK: https://www.snapeda.com/parts/TESEO-LIV3F/STMicroelectronics/view-part/?ref=snap
H1-H4 = holes
IC1 = BMP280-standalone
IC2 = MPXV5100DP; DESCRIPTION: Board Mount Pressure Sensors SOP DUAL PORT; HEIGHT: 9.906mm; MANUFACTURER_NAME: NXP; MANUFACTURER_PART_NUMBER: MPXV5100DP
IC3 IC4 = AS179-92LF; DESCRIPTION: SKYWORKS SOLUTIONS - AS179-92LF - IC, SWITCH, RF, SPDT, 0.02-3.0GHZ; HEIGHT: 1mm; MANUFACTURER_NAME: Skyworks; MANUFACTURER_PART_NUMBER: AS179-92LF
IC6 = MAX8574EUT+T; DESCRIPTION: MAXIM INTEGRATED PRODUCTS - MAX8574EUT+T - DC/DC CONV, BOOST, 800KHZ, 85DEG C; HEIGHT: 1.45mm; MANUFACTURER_NAME: Analog Devices; MANUFACTURER_PART_NUMBER: MAX8574EUT+T
IC8 IC9 = MCP73843-420I_MS; DESCRIPTION: Li-Ion Charge Controller 4.2V MSOP8; HEIGHT: 1.1mm; MANUFACTURER_NAME: Microchip; MANUFACTURER_PART_NUMBER: MCP73843-420I/MS
J2-J5 J9 J13 = 282834-2; AVAILABILITY: In Stock; CENTERLINE_PITCH: 2.54 mm[.1 in]; CHECK_PRICES: https://www.snapeda.com/parts/282834-2/TE+Connectivity+AMP+Connectors/view-part/?ref=eda; COMMENT: 282834-2; DESCRIPTION: Terminal Block Connector PCB 2.54 mm 30-16 AWG Green 10 A 150 V M1.6 | TE Connectivity 282834-2; EU_ROHS_COMPLIANCE: Compliant with Exemptions; MF: TE Connectivity; MP: 282834-2; NUMBER_OF_POSITIONS: 2; PACKAGE: None; PRICE: None; PURCHASE-URL: https://www.snapeda.com/api/url_track_click_mouser/?unipart_id=431057&manufacturer=TE Connectivity&part_name=282834-2&search_term=None; SNAPEDA_LINK: https://www.snapeda.com/parts/282834-2/TE+Connectivity+AMP+Connectors/view-part/?ref=snap
J6 = 503182-1852; DESCRIPTION: Micro SD Normal UltraLowPro8CktEmbsTpPkg; HEIGHT: mm; MANUFACTURER_NAME: Molex; MANUFACTURER_PART_NUMBER: 503182-1852
J7 = XT60-M; AVAILABILITY: Not in stock; DESCRIPTION: Plug; DC supply; XT60; male; PIN: 2; for cable; soldered; 30A; 500V; MF: AMASS; MP: XT60-M; PACKAGE: Package; PRICE: None
J8 J12 = CON-SMA-EDGE-S; AVAILABILITY: In Stock; CHECK_PRICES: https://www.snapeda.com/parts/CON-SMA-EDGE-S/RF+Solutions/view-part/?ref=eda; DESCRIPTION: SMA Connector Jack, Female Socket - Board Edge, End Launch Solder; MF: RF Solutions; MP: CON-SMA-EDGE-S; PACKAGE: None; PRICE: None; PURCHASE-URL: https://www.snapeda.com/api/url_track_click_mouser/?unipart_id=557794&manufacturer=RF Solutions&part_name=CON-SMA-EDGE-S&search_term=None; SNAPEDA_LINK: https://www.snapeda.com/parts/CON-SMA-EDGE-S/RF+Solutions/view-part/?ref=snap
J10 J11 = B2B-XH-A_LF__SN_; AVAILABILITY: In Stock; CHECK_PRICES: https://www.snapeda.com/parts/B2B-XH-A(LF)(SN)/JST+Sales+America+Inc./view-part/?ref=eda; DESCRIPTION: Connector Header Through Hole 2 position 0.098 (2.50mm); MF: JST Sales; MP: B2B-XH-A(LF)(SN); PACKAGE: None; PRICE: None; SNAPEDA_LINK: https://www.snapeda.com/parts/B2B-XH-A(LF)(SN)/JST+Sales+America+Inc./view-part/?ref=snap
LNA = BGA725L6E6327FTSA1; AVAILABILITY: In Stock; CHECK_PRICES: https://www.snapeda.com/parts/BGA725L6E6327FTSA1/Infineon+Technologies/view-part/?ref=eda; DESCRIPTION: The BGA725L6 is a front-end low noise amplifier for Global Navigation Satellite Systems (GNSS) from 1550 MHz to 1615 MHz like GPS, GLONASS, Beidou, Galileo and others.; MF: Infineon Technologies; MP: BGA725L6E6327FTSA1; PACKAGE: XFDFN-6 Infineon Technologies; PRICE: None; PURCHASE-URL: https://www.snapeda.com/api/url_track_click_mouser/?unipart_id=426432&manufacturer=Infineon Technologies&part_name=BGA725L6E6327FTSA1&search_term=None; SNAPEDA_LINK: https://www.snapeda.com/parts/BGA725L6E6327FTSA1/Infineon+Technologies/view-part/?ref=snap
Q1 Q6 Q7 = SI7625DN-T1-GE3; DESCRIPTION: VISHAY - SI7625DN-T1-GE3 - MOSFET, P CHANNEL, -30V, -35A, POWERPAK 1212-8; HEIGHT: 1.12mm; MANUFACTURER_NAME: Vishay; MANUFACTURER_PART_NUMBER: SI7625DN-T1-GE3
RP2040 = RpiPico
SAW = AFS14A04-1575.42-T3; MANUFACTURER: Abracon; MAXIMUM_PACKAGE_HEIGHT: 0.7mm; PARTREV: 04.16.13; SNAPEDA_PN: AFS14A04-1575.42-T3; STANDARD: Manufacturer Recommendations
SX1272 = SX1272IMLTRT; AVAILABILITY: In Stock; CHECK_PRICES: https://www.snapeda.com/parts/SX1272IMLTRT/Semtech+Corporation/view-part/?ref=eda; DESCRIPTION: IC RF TxRx Only 802.15.4 LoRa™ 860MHz ~ 1.02GHz 28-VQFN Exposed Pad; MF: Semtech; MP: SX1272IMLTRT; PACKAGE: VQFN-28 Semtech; PRICE: None; PURCHASE-URL: https://www.snapeda.com/api/url_track_click_mouser/?unipart_id=227639&manufacturer=Semtech&part_name=SX1272IMLTRT&search_term=None; SNAPEDA_LINK: https://www.snapeda.com/parts/SX1272IMLTRT/Semtech+Corporation/view-part/?ref=snap
U1 = BNO055; AVAILABILITY: In Stock; CHECK_PRICES: https://www.snapeda.com/parts/BNO055/Bosch+Sensortec/view-part/?ref=eda; DESCRIPTION: BNO055 series Accelerometer, Gyroscope, Magnetometer, 3 Axis Sensor Evaluation Board; MF: Bosch; MP: BNO055; PACKAGE: LGA-28 Bosch; PRICE: None; PURCHASE-URL: https://www.snapeda.com/api/url_track_click_mouser/?unipart_id=51961&manufacturer=Bosch&part_name=BNO055&search_term=None; SNAPEDA_LINK: https://www.snapeda.com/parts/BNO055/Bosch+Sensortec/view-part/?ref=snap
U2 U3 U5 U7 = BS170F; AVAILABILITY: In Stock; CHECK_PRICES: https://www.snapeda.com/parts/BS170F/Diodes+Inc./view-part/?ref=eda; DESCRIPTION: N-Channel 60 V 150µA (Ta) 330mW (Ta) Surface Mount SOT-23-3; MF: Diodes Inc.; MP: BS170F; PACKAGE: SOT-23 Multicomp; PRICE: None; SNAPEDA_LINK: https://www.snapeda.com/parts/BS170F/Diodes+Inc./view-part/?ref=snap
U6 U9 = ADS1115IDGSR; AVAILABILITY: In Stock; CHECK_PRICES: https://www.snapeda.com/parts/ADS1115IDGSR/Texas+Instruments/view-part/?ref=eda; DESCRIPTION: 16-bit, 860-SPS, 4-channel, delta-sigma ADC with PGA, oscillator, VREF, comparator and I2C; MF: Texas Instruments; MP: ADS1115IDGSR; PACKAGE: VSSOP-10 Texas Instruments; PRICE: None; PURCHASE-URL: https://www.snapeda.com/api/url_track_click_mouser/?unipart_id=45903&manufacturer=Texas Instruments&part_name=ADS1115IDGSR&search_term=ads1115; SNAPEDA_LINK: https://www.snapeda.com/parts/ADS1115IDGSR/Texas+Instruments/view-part/?ref=snap
U$1-U$3 = SN74LVC1G04DBVR; AVAILABILITY: In Stock; CHECK_PRICES: https://www.snapeda.com/parts/SN74LVC1G04DBVR/Umwelt+Sensor+Teknik/view-part/?ref=eda; DESCRIPTION: Inverter IC 1 Channel SOT-23-5; MF: UMW; MP: SN74LVC1G04DBVR; PACKAGE: None; PRICE: None; SNAPEDA_LINK: https://www.snapeda.com/parts/SN74LVC1G04DBVR/Umwelt+Sensor+Teknik/view-part/?ref=snap
U$11 = XT30UPB-M; AVAILABILITY: Not in stock; DESCRIPTION: Socket; DC supply; XT30; male; PIN: 2; on PCBs; THT; yellow; 15A; 500V; MF: amass; MP: XT30UPB-M; PACKAGE: None; PRICE: None
Y1 = FC-135_32.7680KA-A0; AVAILABILITY: In Stock; CHECK_PRICES: https://www.snapeda.com/parts/FC-135%2032.7680KA-A0/EPSON/view-part/?ref=eda; DESCRIPTION: 32.768 kHz ±20ppm Crystal 12.5pF 70 kOhms 2-SMD, No Lead; MF: EPSON; MP: FC-135 32.7680KA-A0; PACKAGE: SMD-2 Epson; PRICE: None; SNAPEDA_LINK: https://www.snapeda.com/parts/FC-135%2032.7680KA-A0/EPSON/view-part/?ref=snap

## Nets
1S_ADC: R78.2 R79.1 U6.5
1S_POW: 1S_POW.1 D3.P$1 Q7.5 Q7.6 Q7.7 Q7.8 Q7.9 Q7.10 Q7.11
1V1: C6.2 C7.2 C8.2 RP2040.23 RP2040.45 RP2040.50
2S_ADC: R16.2 R17.1 U6.4
2S_POW: 1S_POW.2 D4.P$1 Q6.5 Q6.6 Q6.7 Q6.8 Q6.9 Q6.10 Q6.11
3V3: AC1.1 AC1.3 AC1.7 AC1.10 AOA.P$2 C5.1 C9.2 C10.2 C11.2 C12.2 C13.2 C14.2 C15.2 C16.2 C17.1 C19.2 C20.1 C21.1 C25.1 C29.1 C30.2 C31.2 C32.2 C35.1 C40.2 C41.2 C58.2 C115.2 FLASH.8 IC1.6 IC1.8 J6.4 L6.1 R0.2 R10.2 R13.2 R14.1 R27.2 R30.2 R43.1 R72.2 R73.2 R80.2 R81.2 R82.2 R83.2 R84.2 R85.2 REG_3V3.2 REG_3V3.4 REG_3V3.5 REG_3V3.6 RP2040.1 RP2040.10 RP2040.22 RP2040.26 RP2040.33 RP2040.42 RP2040.44 RP2040.48 RP2040.49 SS.P$2 SX1272.1 SX1272.15 U1.3 U1.4 U1.28 U6.8 U9.1 U9.8 U$1.1 U$1.5 U$2.1 U$2.5
5V: C26.1 C27.1 C64.1 C65.2 IC2.2 MOTOR.P$2 R35.2 REG_5V.2 REG_5V.4 REG_5V.5 REG_5V.6
ADC_AVDD: RP2040.43
AIN2: R88.2 R89.1 U6.6
AIN3: R86.2 R87.1 U6.7
AOA_ADC: AOA.P$3 U9.4
BC: J9.2 Q4.1 R70.2 U$3.1 U$3.2 U$3.5
BUZZER: BUZZER.P RP2040.14
CAM: D12.P$1 REG_CAM.16 RP2040.35
CC1: R7.1 X6.A5
CC2: R6.1 X6.B5
CS_SD: J6.2 R43.2 RP2040.7
CS_SX: R27.1 RP2040.32 SX1272.20
CSB: IC1.2 R10.1
CTRL: D6.P$1 REG_FIN_1.16 REG_FIN_2.16 REG_TVC_1.16 REG_TVC_2.16 RP2040.36
D+: R3.2 X6.A6 X6.B6
D-: R4.2 X6.A7 X6.B7
DROGUE: R15.2 RP2040.2 U5.1
F1: R30.1 R31.2 REG_3V3.9
F2: R35.1 R37.2 REG_5V.9
F3: R40.1 R44.2 REG_FIN_1.9
F4: R47.1 R48.2 REG_FIN_2.9
F5: R51.1 R52.2 REG_TVC_1.9
F6: R55.1 R56.2 REG_TVC_2.9
F7: CHG_BST.9 R68.1 R69.2
F8: R24.1 R25.2 REG_CAM.9
FB: C54.1 IC6.1 R18.1 R20.1
FIN_1: FIN_1.P$3 RP2040.13
FIN_2: FIN_2.P$3 RP2040.15
FIN_3: FIN_3.P$3 RP2040.11
FIN_4: FIN_4.P$3 RP2040.12
GND: 32XO.2 32XO.4 AC1.4 AC1.8 AC1.9 AOA.P$1 BOOT.1 C1.2 C2.1 C3.1 C4.2 C5.2 C6.1 C7.1 C8.1 C9.1 C10.1 C11.1 C12.1 C13.1 C14.1 C15.1 C16.1 C17.2 C18.2 C19.1 C20.2 C21.2 C22.1 C23.2 C24.2 C25.2 C26.2 C27.2 C28.1 C29.2 C30.1 C31.1 C32.1 C34.1 C36.1 C38.1 C39.1 C40.1 C41.1 C42.1 C43.1 C44.2 C46.2 C48.2 C49.2 C51.2 C52.2 C55.2 C56.2 C57.2 C58.1 C61.2 C62.2 C63.1 C65.1 C68.2 C69.2 C70.1 C72.1 C75.2 C76.2 C77.1 C79.1 C82.2 C83.2 C84.1 C86.1 C89.2 C90.2 C91.1 C93.1 C96.- C97.1 C98.- C99.- C100.- C101.1 C102.2 C103.2 C104.1 C106.1 C109.2 C110.1 C112.1 C115.1 CHG_BST.3 CHG_BST.11 CHG_BST.15 CHG_BST.18 CHG_BST.22 CHG_BST.29 CHG_BST.P$1 CHG_BST.P$2 CHG_BST.P$3 CHG_BST.P$4 CHG_BST.P$5 CHG_BST.P$6 CHIP_ANT.2 CHIP_ANT.3 FIN_1.P$1 FIN_2.P$1 FIN_3.P$1 FIN_4.P$1 FLASH.4 GNSS.1 GNSS.10 GNSS.12 H1.B3,0 H2.B3,0 H3.B3,0 H4.B3,0 IC1.1 IC1.7 IC2.3 IC3.2 IC4.2 IC6.2 IC8.6 IC9.6 J6.6 J7.N J8.G1 J8.G2 J8.G3 J8.G4 J9.1 J10.1 J11.1 J12.G1 J12.G2 J12.G3 J12.G4 LNA.1 LNA.4 MOTOR.P$1 R2.2 R6.2 R7.2 R8.2 R9.1 R11.1 R15.1 R17.2 R19.2 R20.2 R21.1 R23.1 R25.1 R26.1 R28.1 R29.1 R31.1 R33.1 R34.1 R36.1 R37.1 R39.1 R42.1 R44.1 R46.1 R48.1 R50.1 R52.1 R54.1 R56.1 R58.2 R59.2 R67.1 R69.1 R75.2 R77.2 R79.2 R87.2 R89.2 REG_3V3.3 REG_3V3.11 REG_3V3.15 REG_3V3.18 REG_3V3.22 REG_3V3.29 REG_3V3.P$1 REG_3V3.P$2 REG_3V3.P$3 REG_3V3.P$4 REG_3V3.P$5 REG_3V3.P$6 REG_5V.3 REG_5V.11 REG_5V.15 REG_5V.18 REG_5V.22 REG_5V.29 REG_5V.P$1 REG_5V.P$2 REG_5V.P$3 REG_5V.P$4 REG_5V.P$5 REG_5V.P$6 REG_CAM.3 REG_CAM.11 REG_CAM.15 REG_CAM.18 REG_CAM.22 REG_CAM.29 REG_CAM.P$1 REG_CAM.P$2 REG_CAM.P$3 REG_CAM.P$4 REG_CAM.P$5 REG_CAM.P$6 REG_FIN_1.3 REG_FIN_1.11 REG_FIN_1.15 REG_FIN_1.18 REG_FIN_1.22 REG_FIN_1.29 REG_FIN_1.P$1 REG_FIN_1.P$2 REG_FIN_1.P$3 REG_FIN_1.P$4 REG_FIN_1.P$5 REG_FIN_1.P$6 REG_FIN_2.3 REG_FIN_2.11 REG_FIN_2.15 REG_FIN_2.18 REG_FIN_2.22 REG_FIN_2.29 REG_FIN_2.P$1 REG_FIN_2.P$2 REG_FIN_2.P$3 REG_FIN_2.P$4 REG_FIN_2.P$5 REG_FIN_2.P$6 REG_TVC_1.3 REG_TVC_1.11 REG_TVC_1.15 REG_TVC_1.18 REG_TVC_1.22 REG_TVC_1.29 REG_TVC_1.P$1 REG_TVC_1.P$2 REG_TVC_1.P$3 REG_TVC_1.P$4 REG_TVC_1.P$5 REG_TVC_1.P$6 REG_TVC_2.3 REG_TVC_2.11 REG_TVC_2.15 REG_TVC_2.18 REG_TVC_2.22 REG_TVC_2.29 REG_TVC_2.P$1 REG_TVC_2.P$2 REG_TVC_2.P$3 REG_TVC_2.P$4 REG_TVC_2.P$5 REG_TVC_2.P$6 RP2040.19 RP2040.57 RP2040.58 RP2040.59 RP2040.60 RP2040.61 RP2040.62 RP2040.63 RP2040.64 RP2040.65 RP2040.66 SAW.B SAW.D SAW.E SS.P$1 SX1272.16 SX1272.22 SX1272.26 SX1272.29 SX1272.P$1 SX1272.P$2 SX1272.P$3 SX1272.P$4 SX1272.P$5 SX1272.P$6 SX1272.P$7 SX1272.P$8 SX1272.P$9 TVC_1.P$1 TVC_2.P$1 TVC_3.P$1 TVC_4.P$1 U1.2 U1.5 U1.6 U1.10 U1.15 U1.16 U1.18 U1.25 U2.2 U3.2 U5.2 U6.1 U6.3 U7.2 U9.3 U$1.3 U$2.3 U$3.3 U$11.P$2 X6.A1B12 X6.B1A12 XTAL.2 XTAL.4
GPS_RX: GNSS.3 R81.1 RP2040.27
GPS_TX: GNSS.2 R82.1 RP2040.28
IGN1: R36.2 RP2040.5 U3.1
IGN2: R26.2 RP2040.4 U2.1
LED: LED.P$1 RP2040.37
MAIN: R21.2 RP2040.3 U7.1
MISO: J6.7 R84.1 RP2040.31 SX1272.18
MOS: D13.2 J13.2 Q1.5 Q1.6 Q1.7 Q1.8 Q1.9 Q1.10 Q1.11
MOSI: J6.3 R85.1 RP2040.30 SX1272.19
N$1: D1.2 IC6.4 L8.2
N$2: LED.P$2 R2.1
N$3: C3.2 R5.1 XTAL.1
N$4: C33.1 GNSS.11
N$6: BUZZER.N R8.1
N$7: D12.P$2 R19.1
N$8: J6.1 R13.1
N$9: GNSS.6 GNSS.7 GNSS.8 L6.2
N$10: C22.2 U1.9
N$11: R11.2 U1.17
N$12: J6.8 R72.1
N$14: R74.2 R75.1 U9.6
N$15: R14.2 U1.11
N$16: R22.2 REG_CAM.10
N$17: R76.2 R77.1 U9.7
N$19: C110.2 R22.1
N$21: C59.2 L9.1 REG_3V3.26 REG_3V3.27
N$22: L7.1 LNA.5
N$23: C37.1 L7.2
N$24: C33.2 SAW.A
N$25: LNA.3 SAW.C
N$26: C37.2 IC3.5
N$27: CHIP_ANT.1 IC3.1
N$28: IC3.3 J8.1
N$29: C42.2 SX1272.2
N$30: C43.2 SX1272.3
N$31: C44.1 C45.2 L1.2
N$32: C45.1 IC4.3
N$33: L2.1 SX1272.27
N$34: L1.1 SX1272.25
N$35: C46.1 C47.2 L2.2 L5.2
N$36: C47.1 L3.1
N$37: C48.1 C50.2 L3.2 L4.1
N$38: C49.1 C50.1 IC4.1 L4.2
N$39: C51.1 C52.1 L5.1 SX1272.28
N$40: C53.2 IC4.5
N$41: C53.1 J12.1
N$42: C99.+ D10.1 D11.P$1 IC9.2 R63.1 R65.2
N$43: R41.2 REG_3V3.10
N$44: IC9.1 Q2.2 R63.2
N$45: C34.2 R41.1
N$46: R42.2 REG_3V3.14
N$47: C35.2 REG_3V3.1
N$48: C60.1 L9.2 REG_3V3.24 REG_3V3.25
N$49: C59.1 REG_3V3.28
N$51: C57.1 IC6.5 L8.1
N$52: D3.P$2 R28.2
N$53: C54.2 C55.1 D1.1 Q1.4 R18.2
N$54: D4.P$2 R29.2
N$55: D5.P$2 R34.2
N$56: C60.2 REG_3V3.23
N$57: R32.2 REG_5V.10
N$58: C63.2 R32.1
N$59: R33.2 REG_5V.14
N$60: C64.2 REG_5V.1
N$61: C66.2 L10.1 REG_5V.26 REG_5V.27
N$62: C67.1 L10.2 REG_5V.24 REG_5V.25
N$63: C66.1 REG_5V.28
N$64: C67.2 REG_5V.23
N$65: R38.2 REG_FIN_1.10
N$66: C70.2 R38.1
N$67: R39.2 REG_FIN_1.14
N$68: C71.2 REG_FIN_1.1
N$69: C73.2 L11.1 REG_FIN_1.26 REG_FIN_1.27
N$70: C74.1 L11.2 REG_FIN_1.24 REG_FIN_1.25
N$71: C73.1 REG_FIN_1.28
N$72: C74.2 REG_FIN_1.23
N$73: R45.2 REG_FIN_2.10
N$74: C77.2 R45.1
N$75: R46.2 REG_FIN_2.14
N$76: C78.2 REG_FIN_2.1
N$77: C80.2 L12.1 REG_FIN_2.26 REG_FIN_2.27
N$78: C81.1 L12.2 REG_FIN_2.24 REG_FIN_2.25
N$79: C80.1 REG_FIN_2.28
N$80: C81.2 REG_FIN_2.23
N$81: R49.2 REG_TVC_1.10
N$82: C84.2 R49.1
N$83: R50.2 REG_TVC_1.14
N$84: C85.2 REG_TVC_1.1
N$85: C87.2 L13.1 REG_TVC_1.26 REG_TVC_1.27
N$86: C88.1 L13.2 REG_TVC_1.24 REG_TVC_1.25
N$87: C87.1 REG_TVC_1.28
N$88: C88.2 REG_TVC_1.23
N$89: R53.2 REG_TVC_2.10
N$90: C91.2 R53.1
N$91: R54.2 REG_TVC_2.14
N$92: C92.2 REG_TVC_2.1
N$93: C94.2 L14.1 REG_TVC_2.26 REG_TVC_2.27
N$94: C95.1 L14.2 REG_TVC_2.24 REG_TVC_2.25
N$95: C94.1 REG_TVC_2.28
N$96: C95.2 REG_TVC_2.23
N$97: D6.P$2 R58.1
N$98: D7.P$2 R59.1
N$99: C96.+ D8.1 D9.P$1 IC8.2 R60.1 R62.2
N$100: IC8.1 Q3.2 R60.2
N$101: D9.P$2 R61.1
N$102: IC8.3 R61.2
N$103: IC8.4 R62.1
N$104: IC8.8 Q3.1
N$105: D11.P$2 R64.1
N$106: C97.2 IC8.5
N$107: IC9.3 R64.2
N$108: IC9.4 R65.1
N$109: IC9.8 Q2.1
N$110: C101.2 IC9.5
N$111: CHG_BST.10 R66.2
N$112: C104.2 R66.1
N$113: CHG_BST.14 R67.2
N$114: C105.2 CHG_BST.1
N$115: C107.2 CHG_BST.26 CHG_BST.27 L15.1
N$116: C108.1 CHG_BST.24 CHG_BST.25 L15.2
N$117: C107.1 CHG_BST.28
N$118: C108.2 CHG_BST.23
N$119: R23.2 REG_CAM.14
N$120: C111.2 REG_CAM.1
N$121: Q5.1 U$3.4
N$122: C113.2 L16.1 REG_CAM.26 REG_CAM.27
N$123: C114.1 L16.2 REG_CAM.24 REG_CAM.25
N$124: C113.1 REG_CAM.28
N$125: C114.2 REG_CAM.23
N_RXTX: IC4.6 U$2.4
N_S: IC3.6 U$1.4
P1: C4.1 REG_3V3.8 REG_3V3.12 REG_3V3.13
P2: C62.1 REG_5V.8 REG_5V.12 REG_5V.13
P3: C69.1 REG_FIN_1.8 REG_FIN_1.12 REG_FIN_1.13
P4: C76.1 REG_FIN_2.8 REG_FIN_2.12 REG_FIN_2.13
P5: C83.1 REG_TVC_1.8 REG_TVC_1.12 REG_TVC_1.13
P6: C90.1 REG_TVC_2.8 REG_TVC_2.12 REG_TVC_2.13
P7: C103.1 CHG_BST.8 CHG_BST.12 CHG_BST.13
P8: C109.1 REG_CAM.8 REG_CAM.12 REG_CAM.13
PYRO_DROGUE: J3.2 U5.3
PYRO_IGN1: J4.2 U3.3
PYRO_IGN2: J5.2 U2.3
PYRO_MAIN: J2.2 U7.3
QSPI_SCLK: FLASH.6 RP2040.52
QSPI_SD0: FLASH.5 RP2040.53
QSPI_SD1: FLASH.2 RP2040.55
QSPI_SD2: FLASH.3 RP2040.54
QSPI_SD3: FLASH.7 RP2040.51
QSPI_SS: FLASH.1 R0.1 R1.2 RP2040.56
RXTX: IC4.4 SX1272.23 U$2.2
S: IC3.4 RP2040.34 U$1.2
SCK: J6.5 R83.1 RP2040.29 SX1272.17
SCL: AC1.12 IC1.4 R73.1 RP2040.18 U1.19 U6.10 U9.10
SDA: AC1.2 IC1.3 R80.1 RP2040.17 U1.20 U6.9 U9.9
SDO: IC1.5 R9.2
SS_ADC: SS.P$3 U9.5
TVC_1: RP2040.9 TVC_1.P$3
TVC_2: RP2040.8 TVC_2.P$3
TVC_3: RP2040.16 TVC_3.P$3
TVC_4: RP2040.6 TVC_4.P$3
USB+: Q4.2 Q5.2 R70.1 X6.A4B9 X6.B4A9
USB_BOOT: BOOT.2 R1.1
USB_BST: C105.1 C106.2 CHG_BST.2 CHG_BST.4 CHG_BST.5 CHG_BST.6 D8.2 D10.2 Q6.4 Q7.4 R68.2
USB_CHG: C102.1 CHG_BST.16 CHG_BST.17 CHG_BST.19 CHG_BST.20 CHG_BST.21 Q4.3
USB_DM: R4.1 RP2040.46
USB_DP: R3.1 RP2040.47
V_CAM: C111.1 C112.2 J10.2 J11.2 R24.2 REG_CAM.2 REG_CAM.4 REG_CAM.5 REG_CAM.6
V_FIN_1: C71.1 C72.2 FIN_1.P$2 FIN_2.P$2 R40.2 REG_FIN_1.2 REG_FIN_1.4 REG_FIN_1.5 REG_FIN_1.6
V_FIN_2: C78.1 C79.2 FIN_3.P$2 FIN_4.P$2 R47.2 R88.1 REG_FIN_2.2 REG_FIN_2.4 REG_FIN_2.5 REG_FIN_2.6
V_TVC_1: C85.1 C86.2 R51.2 R86.1 REG_TVC_1.2 REG_TVC_1.4 REG_TVC_1.5 REG_TVC_1.6 TVC_1.P$2 TVC_2.P$2
V_TVC_2: C92.1 C93.2 R55.2 REG_TVC_2.2 REG_TVC_2.4 REG_TVC_2.5 REG_TVC_2.6 TVC_3.P$2 TVC_4.P$2
VBUS: C56.1 D2.2 D5.P$1 IC6.3 IC6.6 Q5.3
VCC: C1.1 C18.1 C61.1 D2.1 D13.1 REG_3V3.16 REG_3V3.17 REG_3V3.19 REG_3V3.20 REG_3V3.21 REG_5V.16 REG_5V.17 REG_5V.19 REG_5V.20 REG_5V.21 REG_CAM.17 REG_CAM.19 REG_CAM.20 REG_CAM.21
VCC_CTRL: 1S_POW.3 C68.1 C75.1 C82.1 C89.1 Q1.1 Q1.2 Q1.3 REG_FIN_1.17 REG_FIN_1.19 REG_FIN_1.20 REG_FIN_1.21 REG_FIN_2.17 REG_FIN_2.19 REG_FIN_2.20 REG_FIN_2.21 REG_TVC_1.17 REG_TVC_1.19 REG_TVC_1.20 REG_TVC_1.21 REG_TVC_2.17 REG_TVC_2.19 REG_TVC_2.20 REG_TVC_2.21
VCC_PYRO: D7.P$1 J2.1 J3.1 J4.1 J5.1 J13.1
VCC_RF: C36.2 GNSS.14 LNA.2 LNA.6
VOLT_DP: C28.2 IC2.4 R74.1
VOLT_MOTOR: MOTOR.P$3 R76.1
XIN: C2.2 RP2040.20 XTAL.3
XIN1: 32XO.3 C38.2 SX1272.4
XIN32: C23.1 U1.27 Y1.1
XOUT: R5.2 RP2040.21
XOUT1: 32XO.1 C39.2 SX1272.5
XOUT32: C24.1 U1.26 Y1.2
XT30+: C98.+ IC8.7 Q3.3 Q7.1 Q7.2 Q7.3 R78.1 U$11.P$1
XT60+: C100.+ IC9.7 J7.P Q2.3 Q6.1 Q6.2 Q6.3 R16.1